# Altium PCB MENB-C-H-DET-S-V1.2 2019.5.27.PcbDoc (part 1 of 2)
Units mil, origin at the board's own origin, x right, y up, seen from the top; angles counter-clockwise.
Board outline 6102.36 x 4921.26 mil, 4 copper layers (Top Layer, GND, PWR, Bottom Layer); 148 components, 226 nets, 628 pads, 138 vias.
Unrouted connection lines stored in the file: 1.
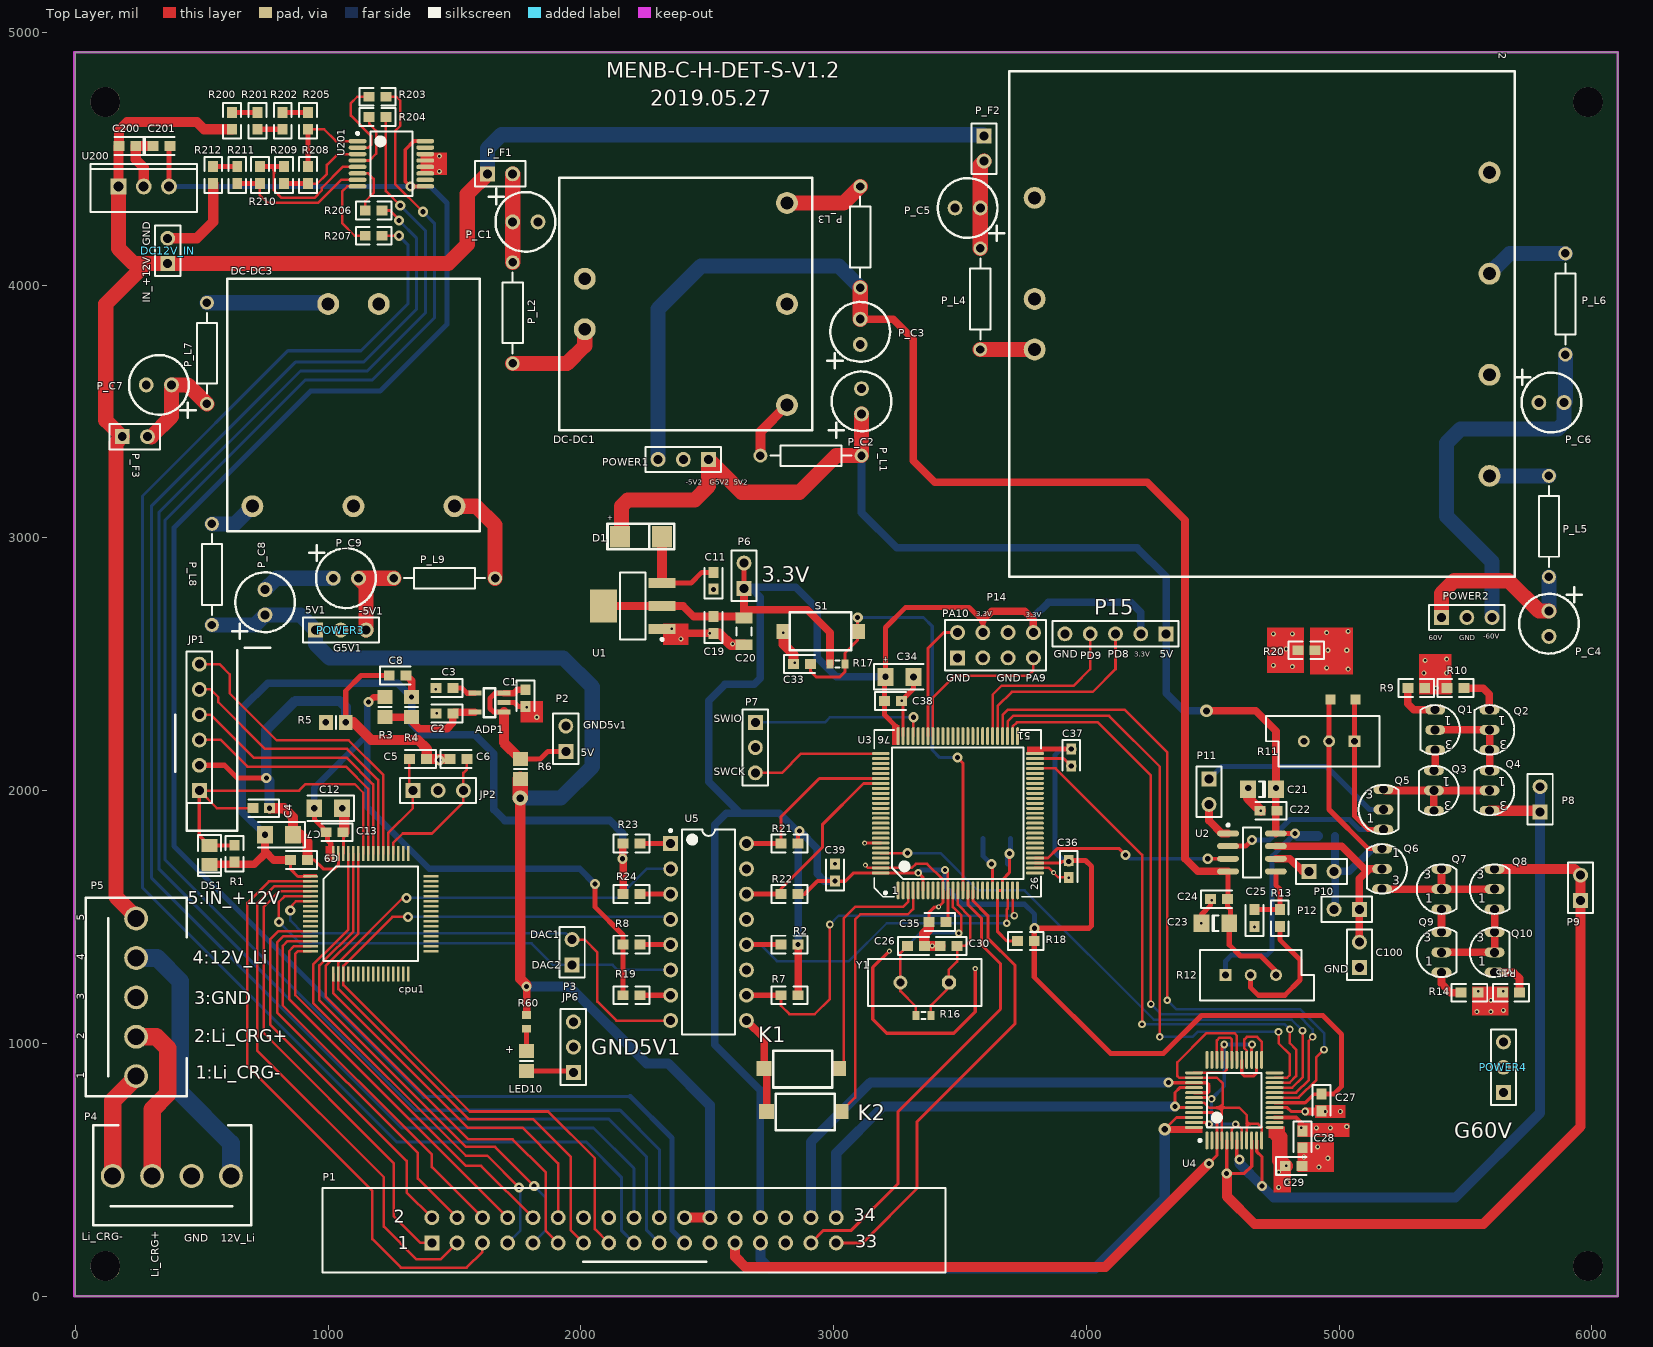
[diagram p0: Top Layer view]
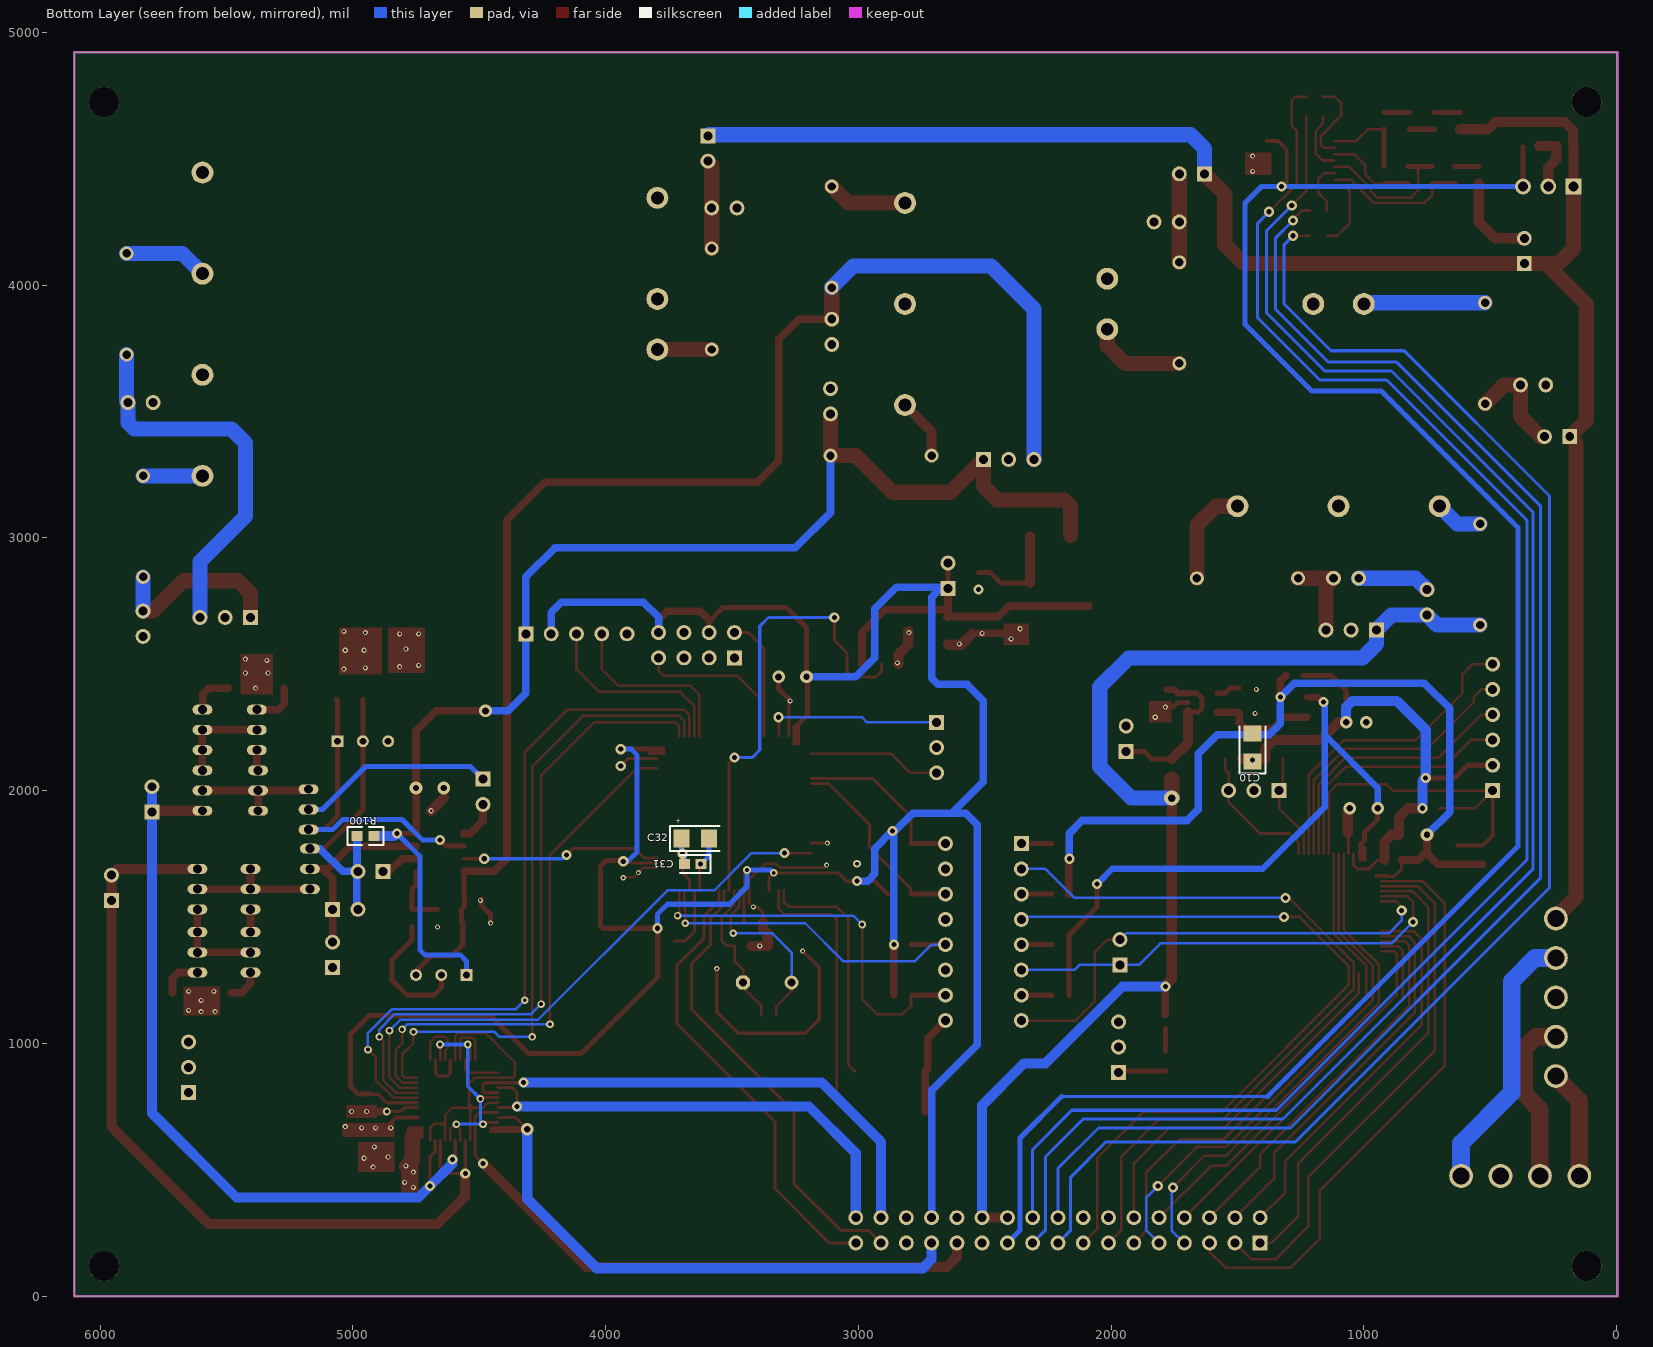
[diagram p1: Bottom Layer view, seen from below]
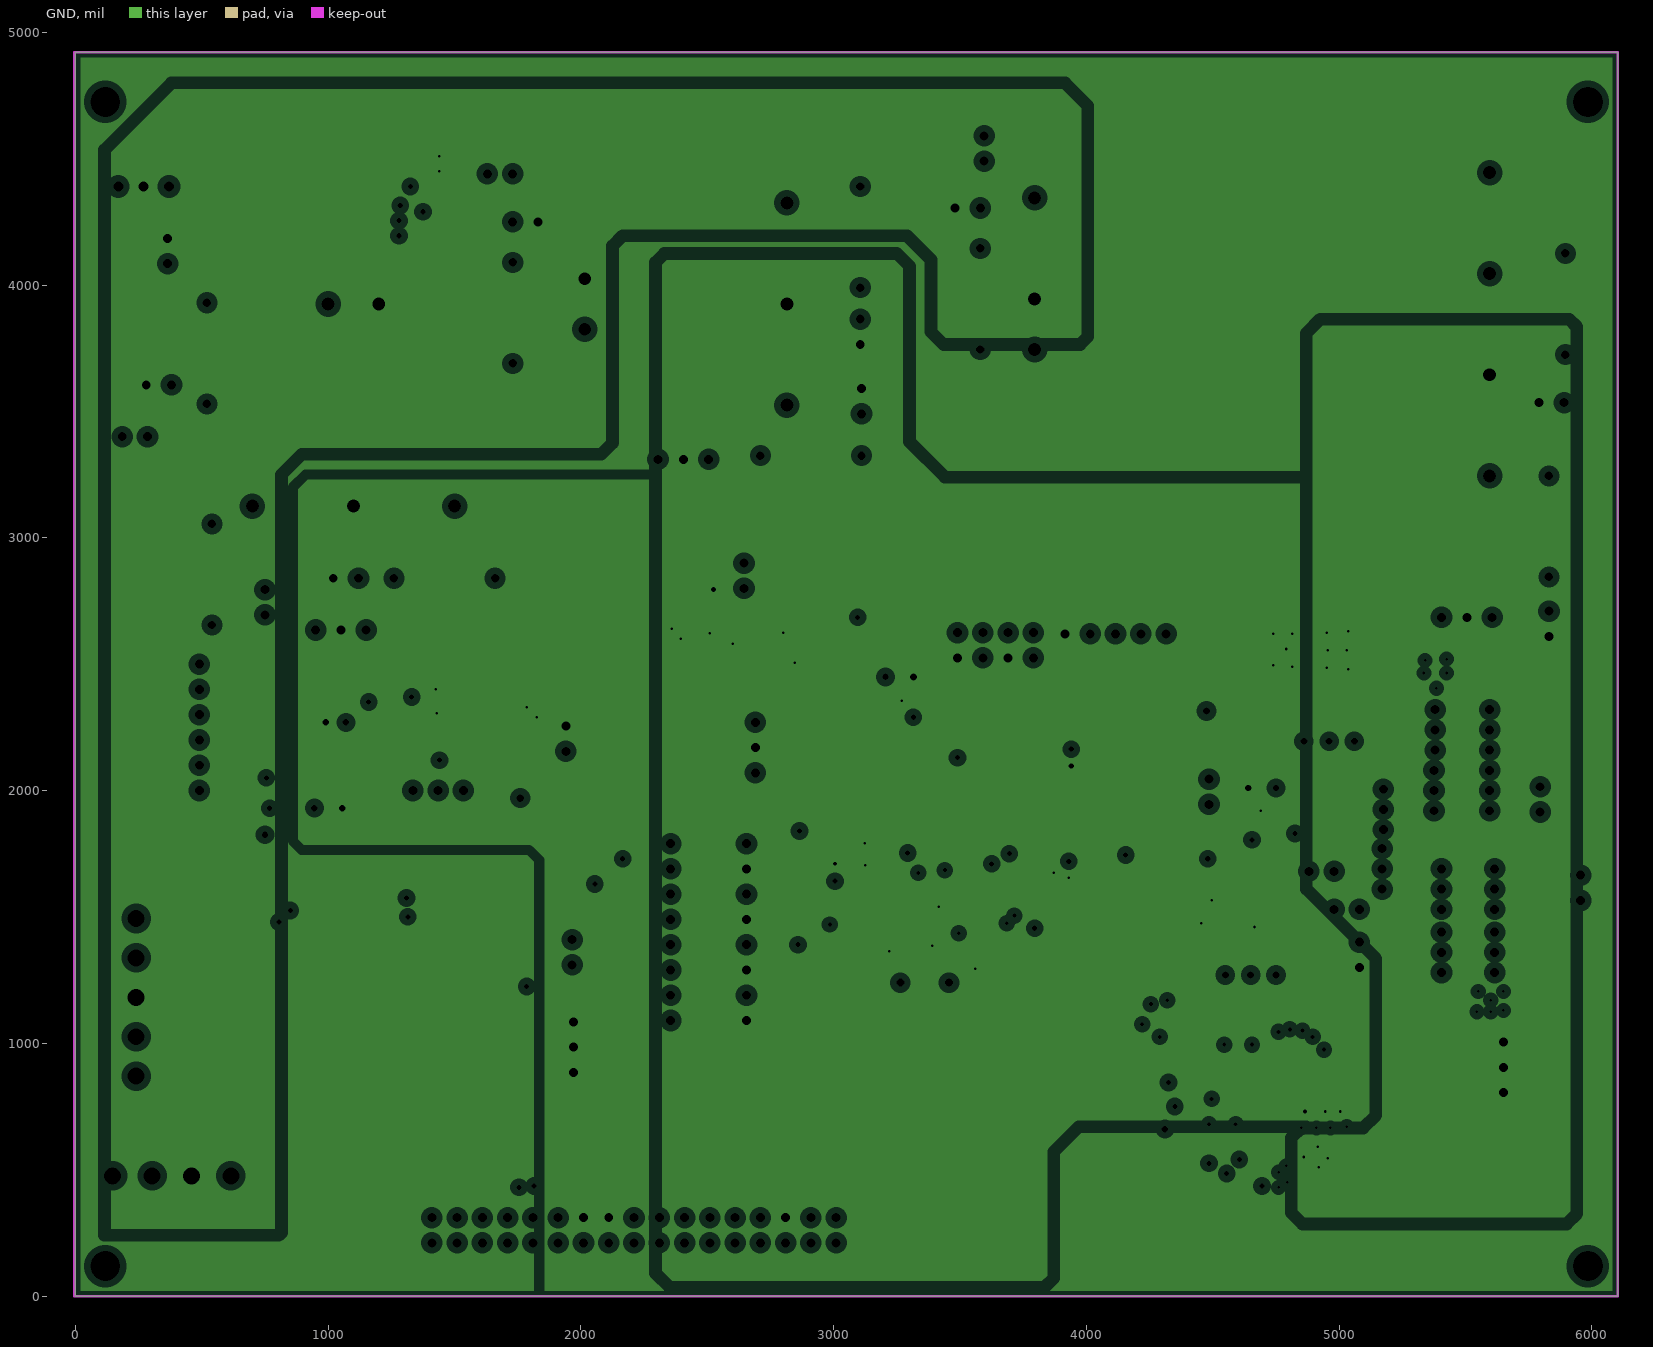
[diagram p2: GND, clearances drawn from the general rule]
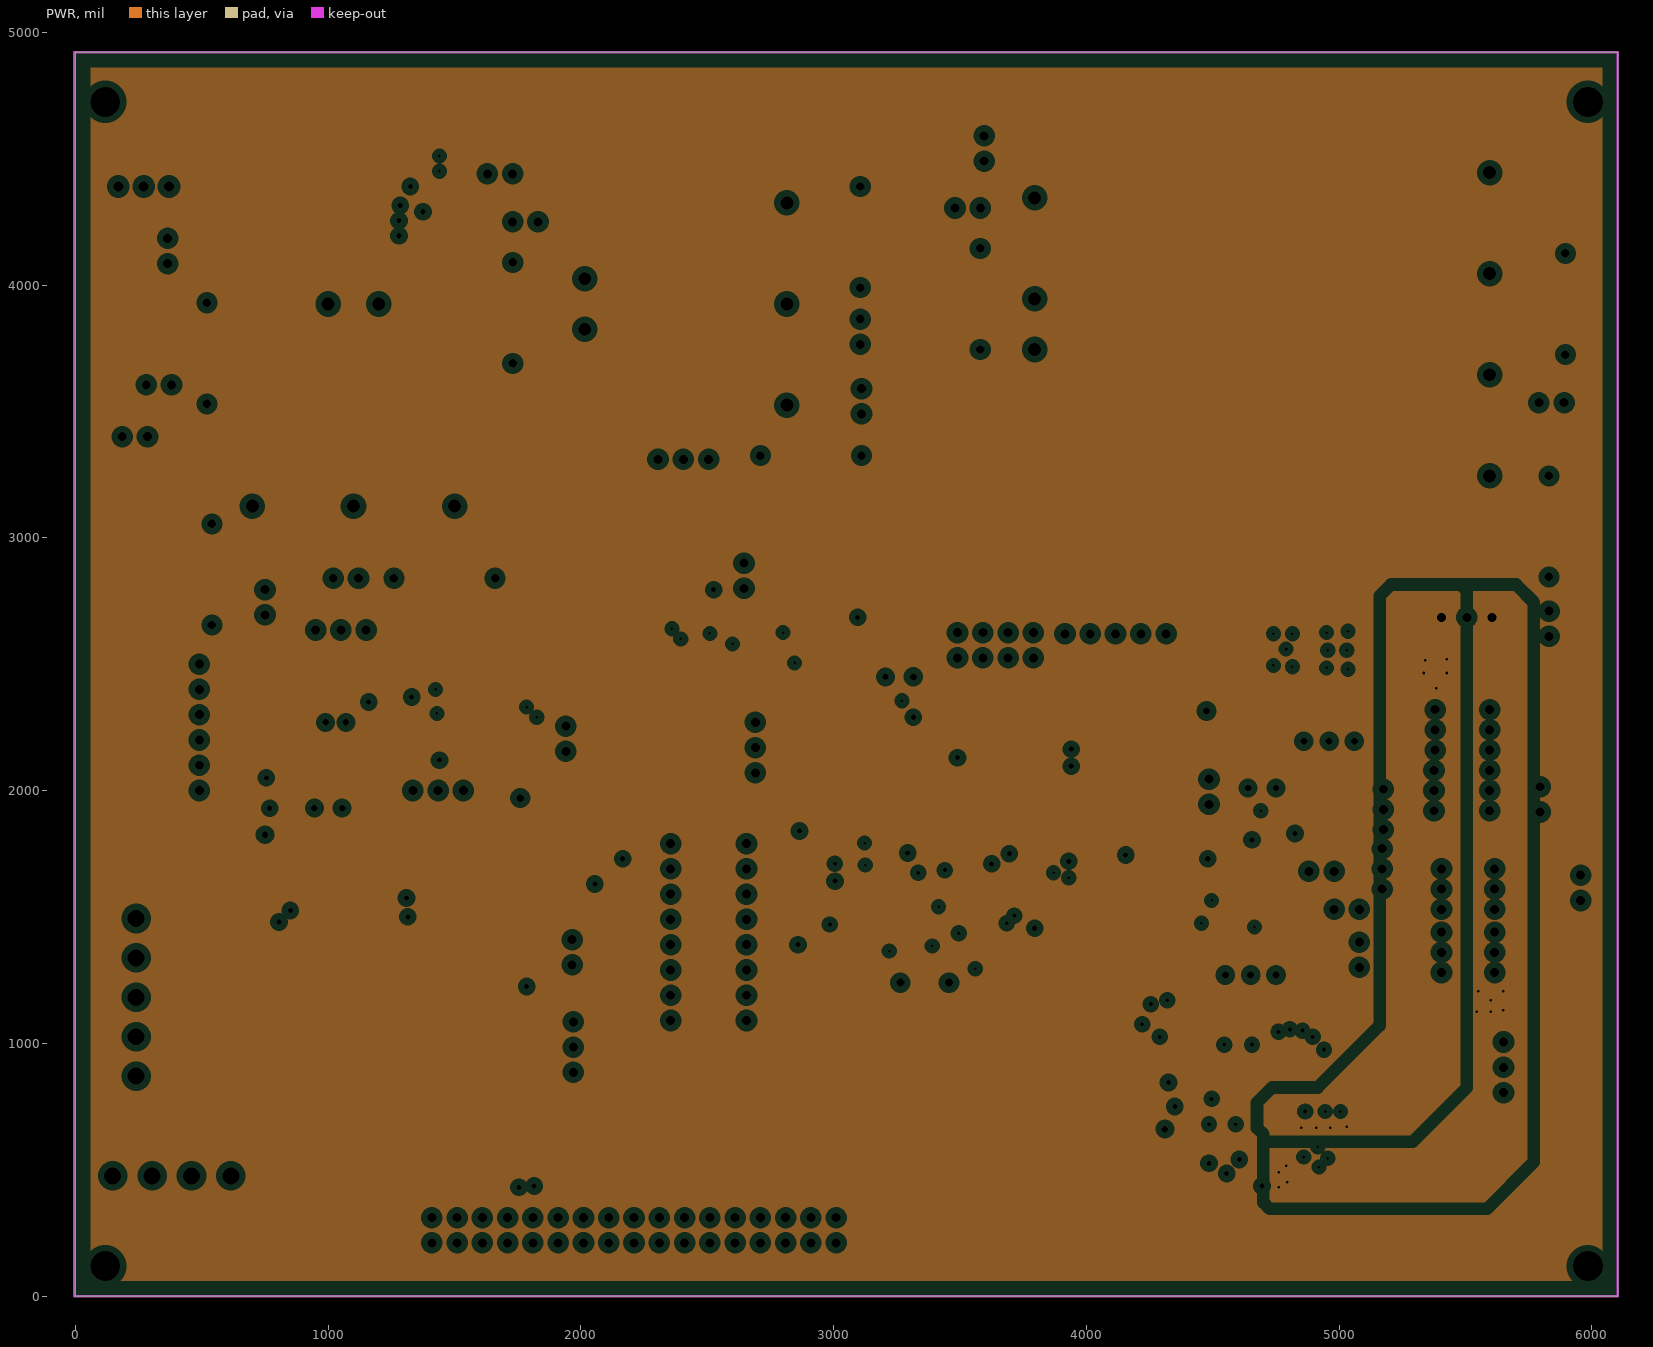
[diagram p3: PWR, clearances drawn from the general rule]

## Layer stack, top to bottom
Top Layer: signal copper 1.4
Dielectric: core 12.6, FR-4, Dk 4.8
GND: plane copper 1.4, net (Multiple Nets)
Dielectric: prepreg 12.6, FR-4, Dk 4.8
PWR: plane copper 1.4, net (Multiple Nets)
Dielectric: core 12.6, FR-4, Dk 4.8
Bottom Layer: signal copper 1.4

## Board outline
0,0 0,4921.26 6102.36,4921.26 6102.36,0

## Design rules (kind name [scope] priority, off if disabled: settings)
Clearance poly [INPolygon] p1: gap=17
Clearance all [All] p2: gap=6
ComponentClearance [All] p1 off: gap=2 collisioncheckmode=3 verticalgap=2 showdistances=FALSE
FabricationTestPointUsage TestPointUsage [All] p1: valid=0 allowmultiple=FALSE
FabricationTestpoint Testpoint [All] p1: side=3 testpointundercomponent=TRUE minsize=40 maxsize=100 preferedsize=60 minholesize=0 maxholesize=40 preferedholesize=32 testpointgrid=1 allowsidetop=TRUE allowsidebottom=TRUE usegrid=TRUE gridtolerance=0.01
HoleSize [All] p1: absolutevalues=TRUE maxlimit=500 minlimit=0 maxpercent=80.000 minpercent=20.000
HoleToHoleClearance [All] p1: gap=1 allowstackedmicrovias=TRUE
MinimumSolderMaskSliver [All] p1: minsoldermaskwidth=0
PlaneClearance [All] p1: clearance=25
PlaneConnect [All] p1: planeconnectstyle=Relief reliefexpansion=20 reliefentries=4 reliefconductorwidth=30 reliefairgap=10
PolygonConnect [All] p1: connectstyle=Relief reliefconductorwidth=15 reliefentries=4 polygonreliefangle="90 Angle"
RoutingVias [All] p1: holewidth=20 width=30 viastyle="Through Hole" minholewidth=8 minwidth=20 maxholewidth=48 maxwidth=50
SilkToSilkClearance [All] p1: silktosilkclearance=0
SilkscreenOverComponentPads [IsPad] p1: minsilkscreentomaskgap=0
SolderMaskExpansion [All] p1: expansion=4
Width Width_GND [InNetClass('GND')] p1: maxlimit=100 minlimit=10 preferedwidth=80 minimp=50.000000 maximp=50.000000 favimp=50.000000
Width Width_POWER [InNetClass('VCC-VEE')] p2: maxlimit=100 minlimit=10 preferedwidth=40 minimp=50.000000 maximp=50.000000 favimp=50.000000
Width Width_ALL [All] p3: maxlimit=100 minlimit=5 preferedwidth=10 minimp=50.000000 maximp=50.000000 favimp=50.000000
18 further rules are at their usual default settings.

## Classes and differential pairs
component class 高压刺激电路: C11 C19 C20 C21 C22 C23 C24 C25 C26 C27 C28 C29 C30 C31 C32 C33 C34 C35 C36 C37 C38 C39 C100 D1 K1 K2 P6 P7 P8 P9 P10 P11 P12 P14 P15 Q1 Q2 Q3 Q4 Q5 Q6 Q7 Q8 Q9 Q10 R9 R10 R11 R12 R13 R14 R15 R16 R17 R18 R20 R100 S1 U1 U2 U3 U4 Y1
component class U_Li_Monitor: C200 C201 R200 R201 R202 R203 R204 R205 R206 R207 R208 R209 R210 R211 R212 U200 U201
component class U_电源3: 2 12-34V 33uH DC-DC1 DC-DC3 P_C1 P_C2 P_C3 P_C4 P_C5 P_C6 P_C7 P_C8 P_C9 P_F1 P_F2 P_F3 P_L1 P_L2 P_L3 P_L4 P_L5 P_L6 P_L7 P_L8 P_L9
component class U_ADC_USB: ADP1 bead C1 C2 C3 C4 C5 C6 C7 C8 C9 C10 C12 C13 cpu1 DS1 JP1 JP2 JP6 LED10 P1 P2 P3 R1 R3 R4 R5 R6 R60
component class 输出板: DC12V_IN P4 P5 POWER1 POWER2 POWER3 POWER4 R2 R7 R8 R19 R21 R22 R23 R24 U5

## Components (designator, comment, footprint, x,y, rotation, side; value= is the part's Value field where it differs from the comment)
2 "12-60" 12-60 3795,3945 r0 top locked
ADP1 "LDO?" ADP1711_3v3 -28325,32510.2 r90 top
C1 "1u" CC1608-0603 1780,2365.2 r270 top
C2 "1u" CC1608-0603 1460,2305.2 r180 top
C3 "10n" CC1608-0603 1460,2405.2 r180 top
C4 "0.1uF" CC1608-0603 735,1930 r180 top
C5 "15p" CC1608-0603 1355,2125 r180 top
C6 "15p" CC1608-0603 1515,2125 r0 top
C7 "10uF" CC3216-1206 805,1825 r180 top
C8 "Cap Semi" CC1608-0603 1275,2455 r0 top
C9 "0.1uF" CC1608-0603 885,1725 r180 top
C10 "10uF" CC3216-1206 1440,2170 r90 bottom
C11 "104" C0603 2525,2830 r90 top
C12 "10uF" CC3216-1206 1000,1930 r180 top
C13 "0.1uF" CC1608-0603 1025,1835 r180 top
C19 "104" C0603 2525,2655 r90 top
C20 "10uF/16V" C1206 2645,2630 r270 top
C21 "Cap" 1206 4695,2005 r180 top
C22 "0.1uF" CC1608-0603 4720,1920 r180 top
C23 "Cap" 1206 4510,1475 r0 top
C24 "0.1uF" CC1608-0603 4525,1570 r0 top
C25 "0.1uF" CC1608-0603 4665,1495 r90 top
C26 "20pF" C0603 3325,1385 r0 top
C27 "0.1uF" C0603 4930,765 r270 top
C28 "0.1uF" C0603 4855,620 r270 top
C29 "0.1uF" C0603 4820,515 r0 top
C30 "20pF" C0603 3455,1385 r180 top
C31 "104" C0603 3655,1710 r0 bottom
C32 "10uF/50V" C0805 3645.04,1810 r180 bottom
C33 "0.1uF" C0603 2875,2500 r0 top
C34 "10uF/50V" C0805 3260,2450 r0 top
C35 "0.1uF" C0603 3410,1480 r180 top
C36 "0.1uF" C0603 3930,1690 r270 top
C37 "0.1uF" C0603 3940,2130 r270 top
C38 "0.1uF" C0603 3235,2355 r0 top
C39 "0.1uF" C0603 3005,1675 r90 top
C100 "Header 2" HDR1X2 5080,1300 r90 top
C200 "0.33uF" cap0603 205,4550 r180 top
C201 "0.1uF" cap0603 340,4550 r0 top
cpu1 "MSP430F169" msp430f149 930,1660 r0 top locked
D1 "SS14" "DO-214 SMA" 2320,3005 r180 top
DC12V_IN "Header 2" HDR1X2 365,4085 r90 top
DC-DC1 "12-5" 12-5 2015,4025 r0 top
DC-DC3 "12-5" 12-5 1200,3925 r270 top
DS1 "IN4148" "SMD _LED" 530,1745 r90 top
JP1 "Header 6" HDR1X6 490,2000 r90 top locked
JP2 "8M" HDR1X3 1335,2000 r0 top
JP6 "Header 3" HDR1X3 1970,885 r90 top
K1 "RESET" PCBComponent_1 3020,900 r180 top
K2 "RESET" PCBComponent_1 3030,730 r180 top
LED10 "LED" 6-0805_M 1785,930 r270 top
P1 "Header 17X2" HDR2X17-NIUJIAO 1410,210 r0 top
P2 "Header 2" HDR1X2 1940,2155 r90 top (schematic designator JP1)
P3 "Header 2" HDR1X2 1965,1310 r90 top
P4 "Header 4" POWER-4P 615,475 r180 top
P5 "Header 5" POWER-5P 240,870 r90 top
P6 "Header 2" HDR1X2 2645,2800 r90 top
P7 "ST-LINK" HDR1X3 2690,2270 r270 top
P8 "Header 2" HDR1X2 5795,1915 r90 top
P9 "Header 2" HDR1X2 5955,1565 r90 top
P10 "Header 2" HDR1X2 4880,1680 r0 top
P11 "Header 2" HDR1X2 4485,2045 r270 top
P12 "Header 2" HDR1X2 5080,1530 r180 top
P14 "Header 4X2A" HDR2X4_CEN 3490,2525 r0 top
P15 "Header 5" HDR1X5 4315,2620 r180 top
P_C1 "Cap Pol3" cap_2.54 1780,4250 r0 top
P_C2 "Cap Pol3" cap_2.54 3110,3540 r90 top
P_C3 "Cap Pol3" cap_2.54 3105,3815 r90 top
P_C4 "10uF/100V" cap_2.54 5830,2660 r270 top
P_C5 "Cap Pol3" cap_2.54 3530,4305 r180 top
P_C6 "10uF/100V" cap_2.54 5840,3535 r0 top
P_C7 "Cap Pol3" cap_2.54 330,3605 r180 top
P_C8 "Cap Pol3" cap_2.54 750,2745 r90 top
P_C9 "Cap Pol3" cap_2.54 1070,2840 r0 top
P_F1 "Fuse 1" HDR1X2 1630,4440 r0 top
P_F2 "Fuse 1" HDR1X2 3595,4590 r270 top
P_F3 "Fuse 1" HDR1X2 185,3400 r0 top
P_L1 "Inductor" AXIAL-0.4 2910,3325 r0 top
P_L2 "Inductor" AXIAL-0.4 1730,3890 r270 top
P_L3 "Inductor" AXIAL-0.4 3105,4190 r270 top
P_L4 "Inductor" AXIAL-0.4 3580,3945 r270 top
P_L5 "Inductor" AXIAL-0.4 5830,3045 r270 top
P_L6 "Inductor" AXIAL-0.4 5895,3925 r270 top
P_L7 "Inductor" AXIAL-0.4 520,3730 r90 top
P_L8 "Inductor" AXIAL-0.4 540,2855 r270 top
P_L9 "Inductor" AXIAL-0.4 1460,2840 r180 top
POWER1 "Header 3" HDR1X3 2505,3310 r180 top
POWER2 "Header 3" HDR1X3 5405,2685 r0 top
POWER3 "Header 3" HDR1X3 950,2635 r0 top
POWER4 "Header 3" HDR1X3 5650,805 r90 top
Q1 "2N6520" TO-92A 5380,2240 r180 top
Q2 "2N6520" TO-92A 5595,2240 r180 top
Q3 "2N6520" TO-92A 5375,2000 r180 top
Q4 "2N6520" TO-92A 5595,2000 r180 top
Q5 "2N6517" TO-92A 5175,1925 r0 top
Q6 "2N6520" TO-92A 5170,1690 r180 top
Q7 "2N6517" TO-92A 5405,1610 r0 top
Q8 "2N6517" TO-92A 5615,1610 r0 top
Q9 "2N6517" TO-92A 5405,1360 r0 top
Q10 "2N6517" TO-92A 5615,1360 r0 top
R1 "100K" C1608-0603 630,1750 r270 top
R2 "10k" R0603 2825,1390 r180 top
R3 "1" 6-0805_M 1225,2330 r270 top
R4 "1" 6-0805_M 1330,2330 r270 top
R5 "Bead" 6-0805_M 1030,2270 r180 top
R6 "Bead" 6-0805_M 1760,2085 r270 top
R7 "10k" R0603 2825,1190 r0 top
R8 "1k" R0603 2200,1390 r0 top
R9 "Res3" C1608-0603 5305,2405 r0 top
R10 "Res3" C1608-0603 5460,2405 r180 top
R11 "100" VR5 4960,2195 r180 top
R12 "20k" VR5 4650,1270 r0 top
R13 "Res3" C1608-0603 4765,1495 r270 top
R14 "Res3" C1608-0603 5515,1200 r180 top
R15 "Res3" C1608-0603 5680,1200 r0 top
R16 "1M" J1-0603 3355,1110 r180 top
R17 "10K" J1-0603 3015,2500 r180 top
R18 "10R" R0603 3760,1405 r180 top
R19 "1k" R0603 2200,1190 r0 top
R20 "0R" R0603 4870,2555 r0 top
R21 "10k" R0603 2825,1790 r180 top
R22 "10k" R0603 2825,1590 r0 top
R23 "1k" R0603 2200,1790 r0 top
R24 "1k" R0603 2200,1590 r0 top
R60 "2K" 1608[0603] 1785,1085 r90 top
R100 "Res3" C1608-0603 4950,1820 r180 bottom
R200 "36k" RES0603 620,4650 r270 top
R201 "10k" RES0603 720,4650 r90 top
R202 "10k" RES0603 820,4650 r270 top
R203 "2k" RES0603 1195,4745 r0 top
R204 "2k" RES0603 1195,4665 r0 top
R205 "36k" RES0603 920,4650 r90 top
R206 "2k" RES0603 1180,4295 r0 top
R207 "2k" RES0603 1180,4195 r0 top
R208 "1.8k" RES0603 920,4435 r90 top
R209 "1.5k" RES0603 825,4435 r270 top
R210 "750R" RES0603 730,4435 r90 top
R211 "10k" RES0603 640,4435 r270 top
R212 "750R" RES0603 545,4435 r90 top
S1 "RESET" SWITCH 3070,2630 r180 top
U1 "AMS1117-3.3" SOT223-4M 2205,2730 r180 top
U2 "TLC2252" INA128_SO8 4655,1755 r0 top
U3 "STM32F103VET6" LQFP100 3255,1605 r90 top
U4 "MAX14803" TQFP48_N 4585,775 r90 top
U5 "TLP521-4" DIP-16 2505,1440 r0 top
U200 "L7805" TO-220-AB 270,4390 r0 top
U201 "CN1185" SSOP16_L 1250,4480 r0 top
Y1 "8M" BCY-W2/E4.7 3360,1240 r180 top

## Footprints (in the part's own frame and the unit in brackets; to place one, negate y for a bottom-side part, rotate by r counter-clockwise, add the part's x,y. Pads: shape width x height; smd on the part's side, far side on the other; paste and mask are expansions set on the pad)
6-0805_M [mm]
  rect 1.4x1.5 smd: 1(-1,0) 2(1,0)
  silkscreen extent 0,-0.65 0,0.65, body extent -1.07,-0.7 1.07,0.7, height 0.7
12-5 [mm]
  round 2.2 hole 1.3: 1(0,-5.08) 2(0,0) 3(20.32,7.62) 4(20.32,-2.54) 5(20.32,-12.7)
  silkscreen extent -2.54,-15.24 22.86,10.16
12-60 [mm]
  round 2.2 hole 1.3: 1(0,0) 2(0,-5.08) 3(45.72,2.54) 4(45.72,-7.62) 5(45.72,-17.78) 6(0,10.16) 7(45.72,12.7)
  silkscreen extent -2.54,-27.94 48.26,22.86
1206 [mm]
  rect 1.6x1.8 smd: 1(-1.4,0) 2(1.4,0)
  silkscreen extent -0.3,-0.8 0.3,0.8
1608[0603] [mm] "Chip Capacitor, Body 1.6x0.8mm, IPC High Density"
  rect 0.8x0.9 smd: 1(-0.7,0) 2(0.7,0)
  body extent -0.87,-0.48 0.87,0.48, height 1.3
ADP1711_3v3 [mm]
  rect 0.5x1.3 smd: 1(-767.08,-762.508) 2(-766.13,-762.508) 3(-765.18,-762.508) 4(-765.18,-759.587) 5(-767.08,-759.587)
  silkscreen extent -767.59,-761.62 -764.67,-760.48
AXIAL-0.4 [mm]
  round 1.4 hole 0.85: 1(-5.08,0) 2(5.08,0)
  silkscreen extent -4.06,-1.02 4.06,1.02
BCY-W2/E4.7 [mm]
  oct 1.4x1.4 hole 0.8: 1(-2.44,0)
  round 1.4 hole 0.8: 2(2.44,0)
  silkscreen extent -5.7,-2.35 5.7,2.35
C0603 [mm]
  rect 1.1x1 smd: 1(-0.85,0) 2(0.85,0)
  silkscreen extent -1.8,-0.9 1.3,0.9
C0805 [mm]
  rect 1.6x1.8 smd: 1(-1.4,0) 2(1.4,0)
  silkscreen extent -2.54,-1.27 2.41,1.27
C1206 [mm]
  rect 1.1x1.7 smd: 1(-1.35,0) 2(1.35,0)
  silkscreen extent -0.4,-0.75 0.4,0.75, body extent -1.7,-0.9 1.7,0.9, height 1.3
C1608-0603 [mm]
  rect 1.1x1 smd: 1(-0.85,0) 2(0.85,0)
  silkscreen extent -1.8,-0.9 1.8,0.9
cap0603 [mm]
  rect 1.1x1 smd: 1(-0.85,0) 2(0.85,0)
  silkscreen extent -1.8,-0.9 1.3,0.9
cap_2.54 [mm]
  round 1.5 hole 0.9: 1(-1.27,0) 2(1.27,0)
  silkscreen extent -3.68,-3 3,3.3
CC1608-0603 [mm]
  rect 1.1x1 smd: 1(-0.85,0) 2(0.85,0)
  silkscreen extent -1.8,-0.9 1.3,0.9
CC3216-1206 [mm]
  rect 1.6x1.8 smd: 1(-1.4,0) 2(1.4,0)
  silkscreen extent -2.6,-1.3 2.1,1.3
DIP-16 [mm]
  rect 1.5x1.5 hole 0.9: 1(-3.81,8.89)
  round 1.5 hole 0.9: 2(-3.81,6.35) 3(-3.81,3.81) 4(-3.81,1.27) 5(-3.81,-1.27) 6(-3.81,-3.81) 7(-3.81,-6.35) 8(-3.81,-8.89) 9(3.81,-8.89) 10(3.81,-6.35) 11(3.81,-3.81) 12(3.81,-1.27) 13(3.81,1.27) 14(3.81,3.81) 15(3.81,6.35) 16(3.81,8.89)
  silkscreen extent -3.93,-10.3 2.65,10.31, body extent -3.6,-10.28 3.6,10.28, height 5.08
"DO-214 SMA" [mil]
  rect 79x85 smd: A(165,0) K(0,0)
  silkscreen extent -50,-50 215,50
HDR1X2 [mm]
  rect 1.5x1.5 hole 0.9: 1(0,0)
  round 1.5 hole 0.9: 2(2.54,0)
  silkscreen extent -1.27,-1.27 3.81,1.27
HDR1X3 [mm] "Connector; Header; 3 Position"
  rect 1.5x1.5 hole 0.9: 1(0,0)
  round 1.5 hole 0.9: 2(2.54,0) 3(5.08,0)
  silkscreen extent -1.27,-1.27 6.35,1.27
HDR1X5 [mm]
  rect 1.5x1.5 hole 0.9: 1(0,0)
  round 1.5 hole 0.9: 2(2.54,0) 3(5.08,0) 4(7.62,0) 5(10.16,0)
  silkscreen extent -1.27,-1.27 11.43,1.27
HDR1X6 [mm]
  rect 1.5x1.5 hole 0.9: 1(0,0)
  round 1.5 hole 0.9: 2(2.54,0) 3(5.08,0) 4(7.62,0) 5(10.16,0) 6(12.7,0)
  silkscreen extent -1.27,-1.27 13.97,1.27
HDR2X4_CEN [mm]
  rect 1.5x1.5 hole 0.9: 1(0,0)
  round 1.5 hole 0.9: 2(2.54,0) 3(5.08,0) 4(7.62,0) 5(0,2.54) 6(2.54,2.54) 7(5.08,2.54) 8(7.62,2.54)
  silkscreen extent -1.27,-1.27 8.89,3.81
HDR2X17-NIUJIAO [mm]
  rect 1.5x1.5 hole 0.9: 1(0,0)
  round 1.5 hole 0.9: 2(0,2.54) 3(2.54,0) 4(2.54,2.54) 5(5.08,0) 6(5.08,2.54) 7(7.62,0) 8(7.62,2.54) 9(10.16,0) 10(10.16,2.54) 11(12.7,0) 12(12.7,2.54) 13(15.24,0) 14(15.24,2.54) 15(17.78,0) 16(17.78,2.54) 17(20.32,0) 18(20.32,2.54) 19(22.86,0) 20(22.86,2.54) 21(25.4,0) 22(25.4,2.54) 23(27.94,0) 24(27.94,2.54) 25(30.48,0) 26(30.48,2.54) 27(33.02,0) 28(33.02,2.54) 29(35.56,0) 30(35.56,2.54) 31(38.1,0) 32(38.1,2.54) 33(40.64,0) 34(40.64,2.54)
  silkscreen extent -11,-2.98 51.6,5.52
INA128_SO8 [mm]
  oval 2.2x0.6 smd: 1(-2.4,1.905) 2(-2.4,0.635) 3(-2.4,-0.635) 4(-2.4,-1.905) 5(2.4,-1.905) 6(2.4,-0.635) 7(2.4,0.635) 8(2.4,1.905)
  silkscreen extent -2.52,-2.5 0.9,2.88, body extent -1.95,-2.45 1.95,2.45, height 1.75
J1-0603 [mm]
  rect 0.7x0.9 smd: 1(-0.75,0) 2(0.75,0)
  silkscreen extent -0.2,-0.35 0.2,0.35, body extent -0.85,-0.48 0.85,0.48, height 0.9
LQFP100 [mm]
  oval 1.8x0.3 smd: 1(0,0) 2(0,-0.5) 3(0,-1) 4(0,-1.5) 5(0,-2) 6(0,-2.5) 7(0,-3) 8(0,-3.5) 9(0,-4) 10(0,-4.5) 11(0,-5) 12(0,-5.5) 13(0,-6) 14(0,-6.5) 15(0,-7) 16(0,-7.5) 17(0,-8) 18(0,-8.5) 19(0,-9) 20(0,-9.5) 21(0,-10) 22(0,-10.5) 23(0,-11) 24(0,-11.5) 25(0,-12) 51(15.5,-12) 52(15.5,-11.5) 53(15.5,-11) 54(15.5,-10.5) 55(15.5,-10) 56(15.5,-9.5) 57(15.5,-9) 58(15.5,-8.5) 59(15.5,-8) 60(15.5,-7.5) 61(15.5,-7) 62(15.5,-6.5) 63(15.5,-6) 64(15.5,-5.5) 65(15.5,-5) 66(15.5,-4.5) 67(15.5,-4) 68(15.5,-3.5) 69(15.5,-3) 70(15.5,-2.5) 71(15.5,-2) 72(15.5,-1.5) 73(15.5,-1) 74(15.5,-0.5) 75(15.5,0)
  oval 0.3x1.8 smd: 26(1.75,-13.75) 27(2.25,-13.75) 28(2.75,-13.75) 29(3.25,-13.75) 30(3.75,-13.75) 31(4.25,-13.75) 32(4.75,-13.75) 33(5.25,-13.75) 34(5.75,-13.75) 35(6.25,-13.75) 36(6.75,-13.75) 37(7.25,-13.75) 38(7.75,-13.75) 39(8.25,-13.75) 40(8.75,-13.75) 41(9.25,-13.75) 42(9.75,-13.75) 43(10.25,-13.75) 44(10.75,-13.75) 45(11.25,-13.75) 46(11.75,-13.75) 47(12.25,-13.75) 48(12.75,-13.75) 49(13.25,-13.75) 50(13.75,-13.75) 76(13.75,1.75) 77(13.25,1.75) 78(12.75,1.75) 79(12.25,1.75) 80(11.75,1.75) 81(11.25,1.75) 82(10.75,1.75) 83(10.25,1.75) 84(9.75,1.75) 85(9.25,1.75) 86(8.75,1.75) 87(8.25,1.75) 88(7.75,1.75) 89(7.25,1.75) 90(6.75,1.75) 91(6.25,1.75) 92(5.75,1.75) 93(5.25,1.75) 94(4.75,1.75) 95(4.25,1.75) 96(3.75,1.75) 97(3.25,1.75) 98(2.75,1.75) 99(2.25,1.75) 100(1.75,1.75)
  silkscreen extent -0.64,-14.35 16.13,2.41
msp430f149 [mm]
  oval 1.5x0.25 smd: 1(0,0)
  rect 1.5x0.25 smd: 2(0,-0.5) 3(0,-1) 4(0,-1.5) 5(0,-2) 6(0,-2.5) 7(0,-3) 8(0,-3.5) 9(0,-4) 10(0,-4.5) 11(0,-5) 12(0,-5.5) 13(0,-6) 14(0,-6.5) 15(0,-7) 16(0,-7.5) 33(12.1,-7.5) 34(12.1,-7) 35(12.1,-6.5) 36(12.1,-6) 37(12.1,-5.5) 38(12.1,-5) 39(12.1,-4.5) 40(12.1,-4) 41(12.1,-3.5) 42(12.1,-3) 43(12.1,-2.5) 44(12.1,-2) 45(12.1,-1.5) 46(12.1,-1) 47(12.1,-0.5) 48(12.1,0)
  rect 0.25x1.5 smd: 17(2.3,-9.8) 18(2.8,-9.8) 19(3.3,-9.8) 20(3.8,-9.8) 21(4.3,-9.8) 22(4.8,-9.8) 23(5.3,-9.8) 24(5.8,-9.8) 25(6.3,-9.8) 26(6.8,-9.8) 27(7.3,-9.8) 28(7.8,-9.8) 29(8.3,-9.8) 30(8.8,-9.8) 31(9.3,-9.8) 32(9.8,-9.8) 49(9.8,2.3) 50(9.3,2.3) 51(8.8,2.3) 52(8.3,2.3) 53(7.8,2.3) 54(7.3,2.3) 55(6.8,2.3) 56(6.3,2.3) 57(5.8,2.3) 58(5.3,2.3) 59(4.8,2.3) 60(4.3,2.3) 61(3.8,2.3) 62(3.3,2.3) 63(2.8,2.3) 64(2.3,2.3)
  silkscreen extent 1.28,-8.51 10.81,1.02
PCBComponent_1 [mm]
  rect 1.5x1.5 smd: 1(0,0) 2(7.5,0)
  silkscreen extent 0.63,-1.78 6.6,1.91
POWER-4P [mm]
  round 2.4 hole 1.7: 1(0,0) 2(3.96,0) 3(7.92,0) 4(11.88,0)
  silkscreen extent -2.03,-5.08 13.84,4.95
POWER-5P [mm]
  round 2.4 hole 1.7: 1(0,0) 2(3.96,0) 3(7.92,0) 4(11.88,0) 5(15.84,0)
  silkscreen extent -2.03,-5.08 17.91,5.08
R0603 [mm]
  rect 1.1x1 smd: 1(-0.85,0) 2(0.85,0)
  silkscreen extent -1.8,-0.9 1.8,0.9
RES0603 [mm]
  rect 1.1x1 smd: 1(-0.85,0) 2(0.85,0)
  silkscreen extent -1.8,-0.9 1.8,0.9
"SMD _LED" [mm]
  rect 1.3x1.6 smd: 1(0.95,0) 2(-0.95,0)
  silkscreen extent -2.13,-1.15 2,1.15
SOT223-4M [mm]
  rect 2.7x1 smd: 1(-2.95,2.3) 2(-2.95,0) 3(-2.95,-2.3)
  rect 2.7x3.3 smd: 4(2.95,0)
  silkscreen extent -3.08,-3.35 1.3,3.47, body extent -1.85,-3.35 1.85,3.35, height 1.8
SSOP16_L [mm]
  oval 1.8x0.45 smd: 1(-3.4,2.275) 2(-3.4,1.625) 3(-3.4,0.975) 4(-3.4,0.325) 5(-3.4,-0.325) 6(-3.4,-0.975) 7(-3.4,-1.625) 8(-3.4,-2.275) 9(3.4,-2.275) 10(3.4,-1.625) 11(3.4,-0.975) 12(3.4,-0.325) 13(3.4,0.325) 14(3.4,0.975) 15(3.4,1.625) 16(3.4,2.275)
  silkscreen extent -3.52,-3.25 2.1,3.25, body extent -2.7,-3.25 2.7,3.25, height 2
SWITCH [mm]
  rect 1.5x1.5 smd: 1(-0.6,0) 4(6.8,0)
  silkscreen extent 0,-1.9 6.2,1.9
TO-92A [mm]
  oval 2x1 hole 0.9: 1(0,-2.032) 2(0,0) 3(0,2.032)
  silkscreen extent -2.48,-2.48 1.5,2.48
TO-220-AB [mm]
  rect 1.6x1.6 hole 1: 1(-2.54,0)
  round 1.6 hole 1: 2(0,0) 3(2.54,0)
  silkscreen extent -5.35,-2.55 5.35,2.25
TQFP48_N [mm]
  oval 1.8x0.3 smd: 1(-4.05,2.75) 2(-4.05,2.25) 3(-4.05,1.75) 4(-4.05,1.25) 5(-4.05,0.75) 6(-4.05,0.25) 7(-4.05,-0.25) 8(-4.05,-0.75) 9(-4.05,-1.25) 10(-4.05,-1.75) 11(-4.05,-2.25) 12(-4.05,-2.75) 25(4.05,-2.75) 26(4.05,-2.25) 27(4.05,-1.75) 28(4.05,-1.25) 29(4.05,-0.75) 30(4.05,-0.25) 31(4.05,0.25) 32(4.05,0.75) 33(4.05,1.25) 34(4.05,1.75) 35(4.05,2.25) 36(4.05,2.75)
  oval 0.3x1.8 smd: 13(-2.75,-4.05) 14(-2.25,-4.05) 15(-1.75,-4.05) 16(-1.25,-4.05) 17(-0.75,-4.05) 18(-0.25,-4.05) 19(0.25,-4.05) 20(0.75,-4.05) 21(1.25,-4.05) 22(1.75,-4.05) 23(2.25,-4.05) 24(2.75,-4.05) 37(2.75,4.05) 38(2.25,4.05) 39(1.75,4.05) 40(1.25,4.05) 41(0.75,4.05) 42(0.25,4.05) 43(-0.25,4.05) 44(-0.75,4.05) 45(-1.25,4.05) 46(-1.75,4.05) 47(-2.25,4.05) 48(-2.75,4.05)
  silkscreen extent -4.17,-2.75 2.75,3.57, body extent -3.5,-3.5 3.5,3.5, height 1.6
VR5 [mm]
  rect 1.2x1.2 hole 0.7: 1(-2.54,0)
  round 1.2 hole 0.7: 2(0,0) 3(2.54,0)
  silkscreen extent -5.08,-2.54 6.35,2.54

## Part data
ADP1: library part ADP1711_3v3
C1 C2 C3 C4 C5 C6 C7 C9 C10 C12: library part "Cap Semi", "Capacitor (Semiconductor SIM Model)"
C8: "Capacitor (Semiconductor SIM Model)"
C11 C19 C22 C24 C25 C26 C27 C28 C29 C30 C31 C33 C35 C36 C37 C38 C39: library part "Cap Semi", "Capacitor (Semicond"
C13: library part "Cap Semi", "Capacitor (Semiconductor SIM Mo"
C20 C21 C23: library part "Cap Pol1", "Polarized C"
C32 C34: library part "Cap Pol3", "Polarized Capacitor (Surface Moun"
C100 P10 P11 P12 P15: "Heade"
C200 C201: library part Cap, "Capacitor"
cpu1: library part MSP430F149
D1: library part Diode, "1.0 Ampere Schottky Ba"
DC12V_IN P2: "Header, 2-Pin"
DS1: library part LED3, "Typical BLUE SiC LED"
JP1: "Header, 6"
JP2: library part "Header 3", "Header, 3-Pin"
JP6 POWER1 POWER2 POWER3 POWER4: "Header, 3"
LED10: library part LED3, "Typical BLUE SiC"
P1: "Header, 17"
P3: "Header, 2"
P4: "Header, 4"
P5: "Header, 5"
P14: "Header, 4-Pin,"
P_C1 P_C2 P_C3 P_C5 P_C8 P_C9: "Polarized Capacitor (Surfac"
P_C4 P_C6: library part "Cap Pol3", "Polarized Capacitor (Surfac"
P_C7: "Polarized Capacitor (Surface Mount)"
P_F1 P_F2: library part Fu
Q1 Q2 Q3 Q4 Q6: library part 2N3906, "PNP General P"
Q5 Q7 Q8 Q9 Q10: library part 2N3904, "NPN General P"
R1 R60: library part Res3, "Resistor"
R2 R7 R8 R19 R21 R22 R23 R24: library part Res1, "Resist"
R3 R4: library part "Res Semi", "Semiconductor Resistor"
R5 R6 R18 R20: library part Res2, "Resistor"
R9 R10 R13 R14 R15: "Resi"
R11 R12: library part ResVa
R200 R201 R202 R203 R204 R205 R206 R207 R208 R209 R210 R211 R212: library part Res1, "Resistor"
S1: library part SW-PB
U2: library part TLC22
Y1: library part XTAL, "Crystal Os"

## Free pads (board coordinates)
  rect 39.37x39.37 smd: 0(4965,2360) 0(5065,2360)
  round 118.11 hole 118.11: 0(5984.25,118.11) 1(118.11,118.11) 2(5984.25,4724.41) 3(118.11,4724.41)

## Via types
v1: diameter 20, hole 10, Top Layer to Bottom Layer, 61 vias
v2: diameter 40, hole 20, Top Layer to Bottom Layer, tented both sides, 41 vias
v3: diameter 30, hole 15, Top Layer to Bottom Layer, tented both sides, 20 vias
v4: diameter 50, hole 25, Top Layer to Bottom Layer, 5 vias
v5: diameter 50, hole 25, Top Layer to Bottom Layer, tented both sides, 4 vias
v6: diameter 40, hole 20, Top Layer to Bottom Layer, 2 vias
v7: diameter 50, hole 28, Top Layer to Bottom Layer, 2 vias
v8: diameter 60, hole 30, Top Layer to Bottom Layer, tented both sides, 1 vias
v9: diameter 31, hole 15, Top Layer to Bottom Layer, tented both sides, 1 vias
v10: diameter 30, hole 15, Top Layer to Bottom Layer, 1 vias

## Nets (pads, with @x,y where several pads share a name; then routed paths per layer and width w, separated by ;. In a path a pad name is that pad's centre, name@x,y a point inside that pad or via, vN(x,y) a via of type N, cw(c..) or ccw(c..) an arc to the next point about the centre after c; other vN are vias at no path point)
3.3V: C19.2 C20.1 C27.1 C34.1 C35.1 C36.1 C37.1 C38.1 C39.1 P1.28 P6.1 P6.2 P14.6 P14.8 P15.2 R2.1 R7.2 R17.2 R18.1 R21.1 R22.2 U1.2 U1.4 U3.6 U3.11 U3.28 U3.50 U3.75 U3.100 U4.18 | length 12990.6
  Top Layer w10: 3247.62,2222.62 U3.75@3255,2215.24 ; v9(3440,1685) 3451.85,1673.15 U3.11@3451.85,1605
  Top Layer w12: U3.28@3796.34,1713.27 3898.27,1713.27 3905,1720 v2(3930,1720)
  Top Layer w13: v2(3005,1641.54) 3046.54,1641.54 3078.9,1673.9 U3.100@3186.1,1673.9 v3(3334.53,1673.9) 3353.43,1655 U3.6@3353.43,1605 ; C35.1@3451.85,1478.15 U3.11@3451.85,1605 ; U4.18@4744.45,765.16 4865.16,765.16 4898.46,798.46 C27.1@4930,798.46
  Top Layer w15: R22.2@2858.46,1590 2885,1590 2936.54,1641.54 v2(3005,1641.54) ; R21.1@2858.46,1790 2858.46,1833.46 v2(2865,1840) ; C34.1@3201.54,2446.65 C34.1@3204.88,2450 ; 3247.62,2222.62 3247.62,2252.38
  Top Layer w20: P6.1@2645,2800 P6.2@2645,2900 ; v2(2858.46,1390) R2.1@2860,1388.46 ; C34.1@3201.54,2446.65 C38.1@3201.54,2355 3201.54,2298.46 3247.62,2252.38 ; C34.1@3204.88,2450 3204.88,2644.88 3285,2725 3535,2725 3590,2670 P14.6@3590,2625 ; U3.50@3805,2150 3805,2155 3813.46,2163.46 v2(3940,2163.46) ; C36.1@3930,1723.46 3996.54,1723.46 4020,1700 4020,1465 4010,1455 v2(3795,1455) 3793.46,1453.46 R18.1@3793.46,1405 3793.46,1261.54 4095,960 4305,960 4455,1110 4935,1110 5010,1035 5010,830 4978.46,798.46 C27.1@4930,798.46
  Top Layer w30: U1.4@2088.86,2730 U1.2@2321.14,2730 2405,2730 2446.54,2688.46 C19.2@2525,2688.46 C20.1@2645,2688.46 ; C20.1@2645,2683.15 C20.1@2645,2688.46 ; P6.1@2645,2800 C20.1@2645,2688.46 ; C20.1@2650,2688.46 C20.1@2645,2688.46 ; 2665,2715 2895,2715 2985.47,2624.53 R17.2@2985.47,2500 ; R7.2@2860,1191.54 R2.1@2860,1390 ; 3590,2670 3590,2675 3625,2710 3755,2710 3790,2675 P14.8@3790,2625
  Bottom Layer w20: v3(3334.53,1673.9) 3345.63,1685 v9(3440,1685) 3440,1620 3510,1550 3755,1550 3795,1510 v2(3795,1455) ; v2(3930,1720) 3911.93,1720 3875,1756.93 3875,2140 3898.46,2163.46 v2(3940,2163.46)
  Bottom Layer w30: P1.28@2710,310 2710,815 2530,995 2530,1865 2575,1910 2630,1910 ; v2@2860,1390 2860,1835 2785,1910 2630,1910 ; v2(2865,1840) 2935,1770 2935,1670 2963.46,1641.54 v2(3005,1641.54) ; v4(3205,2450) 3010,2450 2935,2525 2935,2720 2850,2805 2650,2805 P6.1@2645,2800 2675,2800 2710,2765 2710,2445 2685,2420 2570,2420 2505,2355 2505,2035 2630,1910 ; P14.8@3790,2625 3790,2685 3850,2745 4175,2745 4215,2705 P15.2@4215,2620
5V: ADP1.1 ADP1.3 C1.1 P2.1 R6.1 | length 660.5
  Top Layer w20: ADP1.1@1695,2310.2 1654.8,2310.2 1640,2325 1640,2365 1660,2385 ADP1.3@1695,2385 ; R6.1@1760,2124.37 1839.37,2124.37 1870,2155 P2.1@1940,2155
  Top Layer w25: ADP1.3@1695,2385 1735,2385 1748.66,2398.66 C1.1@1780,2398.66
  Top Layer w40: ADP1.1@1695,2310.2 1695,2189.37 R6.1@1760,2124.37
5V_7805: C201.2 P1.21 U200.3 U201.9 U201.16 | length 7625.9
  Top Layer w15: v2(1325,4390) 1305,4410 1305,4535 1339.57,4569.57 U201.16@1383.86,4569.57 ; v2@1325.43,4390.43 U201.9@1383.86,4390.43
  Top Layer w20: U200.3@370,4390 C201.2@370,4546.54
  Bottom Layer w12: 1380,790 2195,790
  Bottom Layer w20: U200.3@370,4390 v2(1325,4390) 1405,4390 1470,4325 1470,3845 1205,3580 930,3580 390,3040 390,1780 1380,790 ; 2195,790 2360,625 2360,260 P1.21@2410,210
10: cpu1.12 P1.2 | length 1539
  Top Layer w10: cpu1.12@930,1443.47 803.47,1443.47 770,1410 770,1075 1310,535 1310,410 P1.2@1410,310
11: cpu1.13 P1.4 | length 1525.6
  Top Layer w10: cpu1.13@930,1423.78 823.78,1423.78 798,1398 798,1122 1355,565 1355,465 P1.4@1510,310
12: cpu1.14 P1.6 | length 1520.1
  Top Layer w10: cpu1.14@930,1404.09 839.09,1404.09 820,1385 820,1150 1410,560 1410,510 P1.6@1610,310
13: cpu1.15 P1.8 | length 1505.7
  Top Layer w10: cpu1.15@930,1384.41 865.41,1384.41 845,1364 845,1175 P1.8@1710,310
14: cpu1.16 P1.10 | length 1533.5
  Top Layer w10: cpu1.16@930,1364.72 879.72,1364.72 870,1355 870,1190 1545,515 1605,515 P1.10@1810,310
15: cpu1.17 P1.12 | length 1459.6
  Top Layer w10: cpu1.17@1020.55,1274.17 1020.55,1197.58 1553.13,665 1770,665 1910,525 P1.12@1910,310
16: cpu1.18 P1.13 U5.2 | length 3129.2
  Top Layer w10: v2(1310,1575) 1295,1575 1040.24,1320.24 cpu1.18@1040.24,1274.17 1040.24,1214.76 1555,700 1810,700 1960,550 1960,260 P1.13@2010,210
  Bottom Layer w10: v2(1310,1575) 2145,1575 2260,1690 U5.2@2355,1690
17: cpu1.19 P1.15 U5.4 | length 3097.9
  Top Layer w10: v2(1315,1500) 1254.01,1500 1059.92,1305.91 cpu1.19@1059.92,1274.17 1059.92,1230.08 1560,730 1870,730 2055,545 2055,265 P1.15@2110,210
  Bottom Layer w10: v2(1315,1500) 2355,1500 U5.4@2355,1490
20: cpu1.20
21: cpu1.21
22: cpu1.22
23: cpu1.23
24: cpu1.24
25: cpu1.25
26: cpu1.26
27: cpu1.27
30: cpu1.28
31: cpu1.29
32: cpu1.30
33: cpu1.31
34: cpu1.32
35: cpu1.33
36: cpu1.34
37: cpu1.35
40: cpu1.36
41: cpu1.37
42: cpu1.38
43: cpu1.39
44: cpu1.40
45: cpu1.41
46: cpu1.42
47: cpu1.43
50: cpu1.44
51: cpu1.45
52: cpu1.46
53: cpu1.47
54: cpu1.48
55: cpu1.49
56: cpu1.50
57: cpu1.51
60: cpu1.59 P1.11 | length 2077.6
  Top Layer w10: cpu1.59@1118.98,1750.55 1118.98,1433.98 990,1305 990,1185 1555,620 1730,620 1860,490 1860,260 P1.11@1910,210
61: cpu1.60 P1.9 | length 2062
  Top Layer w10: 980,1323.13 1099.29,1442.42 cpu1.60@1099.29,1750.55 ; 985,1328.13 965,1308.13 965,1170 1545,590 1660,590 v2(1815,435)
  Bottom Layer w10: P1.9@1810,210 1860,260 1860,390 v2(1815,435)
62: cpu1.61 P1.7 | length 2009.6
  Top Layer w10: cpu1.61@1079.61,1750.55 1079.61,1449.61 980,1350 978.13,1350 940,1311.87 940,1160 1545,555 1630,555 v2(1755,430)
  Bottom Layer w10: P1.7@1710,210 1760,260 1760,425 v2(1755,430)
63: cpu1.2 P1.5 | length 2362.9
  Top Layer w10: cpu1.2@930,1640.32 765.32,1640.32 680,1555 680,910 1175,415 1175,225 1287.5,112.5 1547.5,112.5 1610,175 P1.5@1610,210
64: cpu1.3 P1.3 | length 2095.1
  Top Layer w10: cpu1.3@930,1620.63 785.63,1620.63 720,1555 720,970 1220,470 1220,275 1350,145 1445,145 P1.3@1510,210
65: cpu1.4 P1.1 | length 1842.1
  Top Layer w10: cpu1.4@930,1600.95 805.95,1600.95 745,1540 745,1040 1260,525 1260,315 1365,210 P1.1@1410,210
66: cpu1.5 P3.1 U5.6 | length 1847.5
  Top Layer w10: v2(805,1480) 805,1510 805,1560 826.26,1581.26 cpu1.5@930,1581.26
  Bottom Layer w10: v2(805,1480) 890,1395 1805,1395 1890,1310 P3.1@1965,1310 2125,1310 2145,1290 U5.6@2355,1290 U5.6@2360,1290
67: cpu1.6 P3.2 U5.8 | length 1931.8
  Top Layer w10: v2(850,1525) 850,1540 871.57,1561.57 cpu1.6@930,1561.57 ; P3.2@1965,1410 2015,1410 2065,1360 2065,1165 2140,1090 U5.8@2355,1090 U5.8@2360,1090
  Bottom Layer w10: v2(850,1525) 850,1485 900,1435 1940,1435 P3.2@1965,1410
A3V3: C12.2 C13.2 cpu1.64 R3.1 R8.1 R19.1 | length 2581.5
  Top Layer w20: C12.2@944.88,1930 944.88,1886.65 996.54,1835 996.54,1803.46 1010,1790 1010,1761.1 1015,1756.1 1015,1745 ; v2(2055,1630) 2055,1540 2166.54,1428.46 R8.1@2166.54,1390 R19.1@2166.54,1190
  Top Layer w25: v2(1160,2350) 1179.37,2369.37 R3.1@1225,2369.37
  Bottom Layer w25: v5(945.12,1930) 945.12,2010.12 1155,2220 ; v2@1155,2340 1155,2220 ; v2(2055,1630) 1995,1690 1400,1690 1155,1935 1155,2220
AD1: P1.31 U3.15 | length 1823.7
  Top Layer w12: P1.31@2910,210 2960,260 3070,260 3255,445 3255,730 3660,1135 3660,1315 3585,1390 3585,1495 3530.59,1549.41 U3.15@3530.59,1605
AD2: P1.33 U3.16 | length 1819.2
  Top Layer w12: P1.33@3010,210 3115,210 3330,425 3330,690 3718,1078 3718,1307.46 3610,1415.46 3610,1505 3550.27,1564.72 U3.16@3550.27,1605
AD3: U3.17
AD4: U3.18
AGND: C31.1 C32.2 U3.20 | length 218.1
  Top Layer w12: U3.20@3629.02,1605 v2@3629.02,1710
  Bottom Layer w20: C32.2@3589.92,1810 3589.92,1741.61 C31.1@3621.54,1710
  other v2: 3625,1710
BOOT1: U3.37
D3V3: C7.2 C8.2 C9.2 C10.2 cpu1.1 DS1.2 R1.2 R4.1 R23.1 R24.1 | length 3469.7
  Top Layer w12: C9.2@851.54,1725 851.54,1688.46 880,1660 cpu1.1@930,1660
  Top Layer w20: v2(2165,1730) v2@2166.54,1728.46
  Top Layer w30: DS1.2@530,1707.6 707.6,1707.6 749.88,1749.88 749.88,1760.12 ; C7.2@749.88,1825 749.88,1760.12 ; C9.2@851.54,1725 785,1725 749.88,1760.12 ; C8.2@1308.46,2455 1330,2433.46 v2(1330,2370) R4.1@1330,2369.37 ; v2(2165,1730) R23.1@2165,1788.46 ; R24.1@2166.54,1590 v2@2166.54,1728.46
  Bottom Layer w30: v4(750,1825) 660,1915 660,2325 760,2425 1275,2425 v2(1330,2370) 1330,2265 1375,2220 1580,2220 1655,2145 1655,1925 1698.46,1881.54 2113.46,1881.54 2165,1830 v2(2165,1730)
DAC: U2.3 U3.29 | length 796.1
  Top Layer w12: U3.29@3796.34,1732.95 3847.95,1732.95 3885,1770 4130,1770 v2(4155,1745)
  Top Layer w15: v2(4480,1730) U2.3@4560.51,1730
  Bottom Layer w15: v2(4155,1745) 4170,1730 v2(4480,1730)
DGND: C4.1 C5.1 C6.1 C7.1 C8.1 C9.1 C10.1 cpu1.63 JP1.2 R5.1 | length 2298.1
  Top Layer w12: C9.1@918.46,1725 945,1725 980,1690 1025,1690 1040.24,1705.24 cpu1.63@1040.24,1750.55
  Top Layer w20: JP1.2@490,2100 590,2100 640,2050 v2(755,2050) ; 1069.37,2300 1069.37,2394.37 1130,2455 C8.1@1241.54,2455
  Top Layer w40: v2(768.46,1930) 825,1930 860.12,1894.88 C7.1@860.12,1825 890,1825 918.46,1796.54 C9.1@918.46,1725 ; 1100,2270 1170,2200 1355,2200 1390,2165 C5.1@1390,2125 ; C5.1@1388.46,2125 C6.1@1481.54,2125
  Bottom Layer w40: v2(768.46,1930) 768.46,2036.54 v2(755,2050) 755,2240 870,2355 1045,2355 1070,2330 v5(1070,2270)
  other v6: 1440,2120
E1_AMP: R21.2 U3.81 U5.16 | length 700.3
  Top Layer w12: R21.2@2791.54,1790 2791.54,1896.54 2942.91,2047.91 U3.81@3186.1,2047.91
  Top Layer w20: U5.16@2655,1790 R21.2@2791.54,1790
E2_AMP: R22.1 U3.82 U5.14 | length 778
  Top Layer w12: R22.1@2791.54,1590 2791.54,1611.54 2955,1775 2955,1865 3118.23,2028.23 U3.82@3186.1,2028.23
  Top Layer w20: U5.14@2655,1590 R22.1@2791.54,1590
GND: 2.1 C200.1 C201.1 DC12V_IN.2 DC-DC1.2 DC-DC3.2 P4.2 P5.3 P_C1.2 P_C5.2 P_C7.2 R212.1 U200.2 U201.11 U201.12 U201.13 U201.14 | length 599.6
  Top Layer w40: U200.2@270,4390 270,4465 238.46,4496.54 C200.1@238.46,4550 C201.1@306.54,4550 ; DC12V_IN.2@365,4185 480,4185 545,4250 R212.1@545,4401.54
  other v1: 1440,4450 1440,4510
GND5V1: ADP1.2 C1.2 C2.2 C3.2 C12.1 C13.1 cpu1.62 DC-DC3.4 JP6.1 JP6.2 JP6.3 LED10.2 P1.14 P1.16 P2.2 P_C8.2 P_C9.1 POWER3.2 R5.2 | length 764.6
  Top Layer w12: v5(1055.12,1930) C12.1@1063.46,1921.65 ; cpu1.62@1059.92,1750.55 C13.1@1059.92,1835
  Top Layer w20: ADP1.2@1695,2347.6 1737.4,2347.6 1753.27,2331.73 C1.2@1780,2331.73 ; LED10.2@1785,890.63 1954.37,890.63 1970,875 JP6.1@1970,885
  Top Layer w40: C13.1@1063.46,1835 C12.1@1063.46,1921.65
  Bottom Layer w60: P_C8.2@750,2795 795,2840 P_C9.1@1020,2840
  other v1: 1825,2290 1430,2305 1785,2330 1425,2400
  other v5: 990,2270